# EAGLE board tetris (EAGLE 6.0)

Size 101.6 x 76.2 mm. Coordinates in mm from the lower left corner, seen from the top.
Outline: 0,0 0,76.2 101.6,76.2 101.6,0 0,0
Copper layers (1*16): Top 0.035mm / dielectric 1.5mm / Bottom 0.035mm
Design rules: minimum track width 10mil, minimum drill 24mil, track to track 8mil, track to pad 8mil, pad to pad 8mil, via to via 8mil, smd to smd 8mil, copper to edge 40mil, drill to drill 8mil, minimum pad ring 10mil, minimum via ring 8mil, stop-mask expansion 4mil, vias tented up to drill 0mil, thermal gap 10mil

## Footprints (pad centres in the part's own frame; a part is rotated, then mirrored left to right if it is on the bottom)
LED3MM = drill 0.813 octagon: A -1.27,0; K 1.27,0
PDIP-T28 = drill 0.813 pad 1.2: 1 -16.51,-3.81; 2 -13.97,-3.81; 3 -11.43,-3.81; 4 -8.89,-3.81; 5 -6.35,-3.81; 6 -3.81,-3.81; 7 -1.27,-3.81; 8 1.27,-3.81; 9 3.81,-3.81; 10 6.35,-3.81; 11 8.89,-3.81; 12 11.43,-3.81; 13 13.97,-3.81; 14 16.51,-3.81; 15 16.51,3.81; 16 13.97,3.81; 17 11.43,3.81; 18 8.89,3.81; 19 6.35,3.81; 20 3.81,3.81; 21 1.27,3.81; 22 -1.27,3.81; 23 -3.81,3.81; 24 -6.35,3.81; 25 -8.89,3.81; 26 -11.43,3.81; 27 -13.97,3.81; 28 -16.51,3.81
B3F-10XX = drill 1.016 long: 1 -3.251,2.261; 2 3.251,2.261; 3 -3.251,-2.261; 4 3.251,-2.261
7SEG-13 = drill 0.813 long: 1 -5.08,-7.62; 2 -2.54,-7.62; 3 0,-7.62; 4 2.54,-7.62; 5 5.08,-7.62; 6 5.08,7.62; 7 2.54,7.62; 8 0,7.62; 9 -2.54,7.62; 10 -5.08,7.62

## Placement (x,y rotation side)
00  [LED3MM]  2.54,15.24 0 top
0A  [LED3MM]  53.34,15.24 0 top
0B  [LED3MM]  58.42,15.24 0 top
0C  [LED3MM]  63.5,15.24 0 top
0D  [LED3MM]  68.58,15.24 0 top
0E  [LED3MM]  73.66,15.24 0 top
01  [LED3MM]  7.62,15.24 0 top
1A  [LED3MM]  53.34,20.32 0 top
1B  [LED3MM]  58.42,20.32 0 top
1C  [LED3MM]  63.5,20.32 0 top
1D  [LED3MM]  68.58,20.32 0 top
1E  [LED3MM]  73.66,20.32 0 top
02  [LED3MM]  12.7,15.24 0 top
2A  [LED3MM]  53.34,25.4 0 top
2B  [LED3MM]  58.42,25.4 0 top
2C  [LED3MM]  63.5,25.4 0 top
2D  [LED3MM]  68.58,25.4 0 top
2E  [LED3MM]  73.66,25.4 0 top
03  [LED3MM]  17.78,15.24 0 top
3A  [LED3MM]  53.34,30.48 0 top
3B  [LED3MM]  58.42,30.48 0 top
3C  [LED3MM]  63.5,30.48 0 top
3D  [LED3MM]  68.58,30.48 0 top
3E  [LED3MM]  73.66,30.48 0 top
04  [LED3MM]  22.86,15.24 0 top
4A  [LED3MM]  53.34,35.56 0 top
4B  [LED3MM]  58.42,35.56 0 top
4C  [LED3MM]  63.5,35.56 0 top
4D  [LED3MM]  68.58,35.56 0 top
4E  [LED3MM]  73.66,35.56 0 top
05  [LED3MM]  27.94,15.24 0 top
5A  [LED3MM]  53.34,40.64 0 top
5B  [LED3MM]  58.42,40.64 0 top
5C  [LED3MM]  63.5,40.64 0 top
5D  [LED3MM]  68.58,40.64 0 top
5E  [LED3MM]  73.66,40.64 0 top
06  [LED3MM]  33.02,15.24 0 top
6A  [LED3MM]  53.34,45.72 0 top
6B  [LED3MM]  58.42,45.72 0 top
6C  [LED3MM]  63.5,45.72 0 top
6D  [LED3MM]  68.58,45.72 0 top
6E  [LED3MM]  73.66,45.72 0 top
07  [LED3MM]  38.1,15.24 0 top
7A  [LED3MM]  53.34,50.8 0 top
7B  [LED3MM]  58.42,50.8 0 top
7C  [LED3MM]  63.5,50.8 0 top
7D  [LED3MM]  68.58,50.8 0 top
7E  [LED3MM]  73.66,50.8 0 top
08  [LED3MM]  43.18,15.24 0 top
8A  [LED3MM]  53.34,55.88 0 top
8B  [LED3MM]  58.42,55.88 0 top
8C  [LED3MM]  63.5,55.88 0 top
8D  [LED3MM]  68.58,55.88 0 top
8E  [LED3MM]  73.66,55.88 0 top
09  [LED3MM]  48.26,15.24 0 top
9A  [LED3MM]  53.34,60.96 0 top
9B  [LED3MM]  58.42,60.96 0 top
9C  [LED3MM]  63.5,60.96 0 top
9D  [LED3MM]  68.58,60.96 0 top
9E  [LED3MM]  73.66,60.96 0 top
10  [LED3MM]  2.54,20.32 0 top
11  [LED3MM]  7.62,20.32 0 top
12  [LED3MM]  12.7,20.32 0 top
13  [LED3MM]  17.78,20.32 0 top
14  [LED3MM]  22.86,20.32 0 top
15  [LED3MM]  27.94,20.32 0 top
16  [LED3MM]  33.02,20.32 0 top
17  [LED3MM]  38.1,20.32 0 top
18  [LED3MM]  43.18,20.32 0 top
19  [LED3MM]  48.26,20.32 0 top
20  [LED3MM]  2.54,25.4 0 top
21  [LED3MM]  7.62,25.4 0 top
22  [LED3MM]  12.7,25.4 0 top
23  [LED3MM]  17.78,25.4 0 top
24  [LED3MM]  22.86,25.4 0 top
25  [LED3MM]  27.94,25.4 0 top
26  [LED3MM]  33.02,25.4 0 top
27  [LED3MM]  38.1,25.4 0 top
28  [LED3MM]  43.18,25.4 0 top
29  [LED3MM]  48.26,25.4 0 top
30  [LED3MM]  2.54,30.48 0 top
31  [LED3MM]  7.62,30.48 0 top
32  [LED3MM]  12.7,30.48 0 top
33  [LED3MM]  17.78,30.48 0 top
34  [LED3MM]  22.86,30.48 0 top
35  [LED3MM]  27.94,30.48 0 top
36  [LED3MM]  33.02,30.48 0 top
37  [LED3MM]  38.1,30.48 0 top
38  [LED3MM]  43.18,30.48 0 top
39  [LED3MM]  48.26,30.48 0 top
40  [LED3MM]  2.54,35.56 0 top
41  [LED3MM]  7.62,35.56 0 top
42  [LED3MM]  12.7,35.56 0 top
43  [LED3MM]  17.78,35.56 0 top
44  [LED3MM]  22.86,35.56 0 top
45  [LED3MM]  27.94,35.56 0 top
46  [LED3MM]  33.02,35.56 0 top
47  [LED3MM]  38.1,35.56 0 top
48  [LED3MM]  43.18,35.56 0 top
49  [LED3MM]  48.26,35.56 0 top
50  [LED3MM]  2.54,40.64 0 top
51  [LED3MM]  7.62,40.64 0 top
52  [LED3MM]  12.7,40.64 0 top
53  [LED3MM]  17.78,40.64 0 top
54  [LED3MM]  22.86,40.64 0 top
55  [LED3MM]  27.94,40.64 0 top
56  [LED3MM]  33.02,40.64 0 top
57  [LED3MM]  38.1,40.64 0 top
58  [LED3MM]  43.18,40.64 0 top
59  [LED3MM]  48.26,40.64 0 top
60  [LED3MM]  2.54,45.72 0 top
61  [LED3MM]  7.62,45.72 0 top
62  [LED3MM]  12.7,45.72 0 top
63  [LED3MM]  17.78,45.72 0 top
64  [LED3MM]  22.86,45.72 0 top
65  [LED3MM]  27.94,45.72 0 top
66  [LED3MM]  33.02,45.72 0 top
67  [LED3MM]  38.1,45.72 0 top
68  [LED3MM]  43.18,45.72 0 top
69  [LED3MM]  48.26,45.72 0 top
70  [LED3MM]  2.54,50.8 0 top
71  [LED3MM]  7.62,50.8 0 top
72  [LED3MM]  12.7,50.8 0 top
73  [LED3MM]  17.78,50.8 0 top
74  [LED3MM]  22.86,50.8 0 top
75  [LED3MM]  27.94,50.8 0 top
76  [LED3MM]  33.02,50.8 0 top
77  [LED3MM]  38.1,50.8 0 top
78  [LED3MM]  43.18,50.8 0 top
79  [LED3MM]  48.26,50.8 0 top
80  [LED3MM]  2.54,55.88 0 top
81  [LED3MM]  7.62,55.88 0 top
82  [LED3MM]  12.7,55.88 0 top
83  [LED3MM]  17.78,55.88 0 top
84  [LED3MM]  22.86,55.88 0 top
85  [LED3MM]  27.94,55.88 0 top
86  [LED3MM]  33.02,55.88 0 top
87  [LED3MM]  38.1,55.88 0 top
88  [LED3MM]  43.18,55.88 0 top
89  [LED3MM]  48.26,55.88 0 top
90  [LED3MM]  2.54,60.96 0 top
91  [LED3MM]  7.62,60.96 0 top
92  [LED3MM]  12.7,60.96 0 top
93  [LED3MM]  17.78,60.96 0 top
94  [LED3MM]  22.86,60.96 0 top
95  [LED3MM]  27.94,60.96 0 top
96  [LED3MM]  33.02,60.96 0 top
97  [LED3MM]  38.1,60.96 0 top
98  [LED3MM]  43.18,60.96 0 top
99  [LED3MM]  48.26,60.96 0 top
A0  [LED3MM]  78.74,15.24 0 top
A1  [LED3MM]  78.74,20.32 0 top
A2  [LED3MM]  78.74,25.4 0 top
A3  [LED3MM]  78.74,30.48 0 top
A4  [LED3MM]  78.74,35.56 0 top
A5  [LED3MM]  78.74,40.64 0 top
A6  [LED3MM]  78.74,45.72 0 top
A7  [LED3MM]  78.74,50.8 0 top
A8  [LED3MM]  78.74,55.88 0 top
A9  [LED3MM]  78.74,60.96 0 top
B0  [LED3MM]  83.82,15.24 0 top
B1  [LED3MM]  83.82,20.32 0 top
B2  [LED3MM]  83.82,25.4 0 top
B3  [LED3MM]  83.82,30.48 0 top
B4  [LED3MM]  83.82,35.56 0 top
B5  [LED3MM]  83.82,40.64 0 top
B6  [LED3MM]  83.82,45.72 0 top
B7  [LED3MM]  83.82,50.8 0 top
B8  [LED3MM]  83.82,55.88 0 top
B9  [LED3MM]  83.82,60.96 0 top
C0  [LED3MM]  88.9,15.24 0 top
C1  [LED3MM]  88.9,20.32 0 top
C2  [LED3MM]  88.9,25.4 0 top
C3  [LED3MM]  88.9,30.48 0 top
C4  [LED3MM]  88.9,35.56 0 top
C5  [LED3MM]  88.9,40.64 0 top
C6  [LED3MM]  88.9,45.72 0 top
C7  [LED3MM]  88.9,50.8 0 top
C8  [LED3MM]  88.9,55.88 0 top
C9  [LED3MM]  88.9,60.96 0 top
D0  [LED3MM]  93.98,15.24 0 top
D1  [LED3MM]  93.98,20.32 0 top
D2  [LED3MM]  93.98,25.4 0 top
D3  [LED3MM]  93.98,30.48 0 top
D4  [LED3MM]  93.98,35.56 0 top
D5  [LED3MM]  93.98,40.64 0 top
D6  [LED3MM]  93.98,45.72 0 top
D7  [LED3MM]  93.98,50.8 0 top
D8  [LED3MM]  93.98,55.88 0 top
D9  [LED3MM]  93.98,60.96 0 top
E0  [LED3MM]  99.06,15.24 0 top
E1  [LED3MM]  99.06,20.32 0 top
E2  [LED3MM]  99.06,25.4 0 top
E3  [LED3MM]  99.06,30.48 0 top
E4  [LED3MM]  99.06,35.56 0 top
E5  [LED3MM]  99.06,40.64 0 top
E6  [LED3MM]  99.06,45.72 0 top
E7  [LED3MM]  99.06,50.8 0 top
E8  [LED3MM]  99.06,55.88 0 top
E9  [LED3MM]  99.06,60.96 0 top
E$1  [PDIP-T28]  20.32,69.85 0 top
E$2  [B3F-10XX]  93.98,69.85 180 top
E$3  [B3F-10XX]  82.55,69.85 180 top
E$4  [B3F-10XX]  93.98,6.35 180 top
E$5  [B3F-10XX]  82.55,6.35 180 top
E$6  [B3F-10XX]  71.12,69.85 180 top
E$7  [B3F-10XX]  71.12,6.35 180 top
E$8  [7SEG-13]  10.16,6.35 90 top
E$9  [7SEG-13]  29.21,6.35 90 top
E$10  [7SEG-13]  48.26,6.35 90 top

## Library data of the parts
00 0A 0B 0C 0D 0E 01 1A 1B 1C 1D 1E 02 2A 2B 2C 2D 2E 03 3A 3B 3C 3D 3E 04 4A 4B 4C 4D 4E 05 5A 5B 5C 5D 5E 06 6A 6B 6C 6D 6E 07 7A 7B 7C 7D 7E 08 8A 8B 8C 8D 8E 09 9A 9B 9C 9D 9E 10-99 A0 A1-A9 B0 B1-B9 C0 C1-C9 D0 D1-D9 E0 E1-E9 = led
E$1 = texas
E$2-E$7 = switch-omron
E$8-E$10 = special

## Nets
D: 00.A 11.A 22.A 33.A 44.A 55.A 66.A 77.A 88.A 99.A
S0: 00.K 0A.A 0B.A 0C.A 0D.A 0E.A 01.A 02.A 03.A 04.A 05.A 06.A 07.A 08.A 09.A 10.K 20.K 30.K 40.K 50.K 60.K 70.K 80.K 90.K A0.K B0.K C0.K D0.K E0.K
S1: 01.K 1A.A 1B.A 1C.A 1D.A 1E.A 10.A 11.K 12.A 13.A 14.A 15.A 16.A 17.A 18.A 19.A 21.K 31.K 41.K 51.K 61.K 71.K 81.K 91.K A1.K B1.K C1.K D1.K E1.K
S2: 02.K 2A.A 2B.A 2C.A 2D.A 2E.A 12.K 20.A 21.A 22.K 23.A 24.A 25.A 26.A 27.A 28.A 29.A 32.K 42.K 52.K 62.K 72.K 82.K 92.K A2.K B2.K C2.K D2.K E2.K
S3: 03.K 3A.A 3B.A 3C.A 3D.A 3E.A 13.K 23.K 30.A 31.A 32.A 33.K 34.A 35.A 36.A 37.A 38.A 39.A 43.K 53.K 63.K 73.K 83.K 93.K A3.K B3.K C3.K D3.K E3.K
S4: 04.K 4A.A 4B.A 4C.A 4D.A 4E.A 14.K 24.K 34.K 40.A 41.A 42.A 43.A 44.K 45.A 46.A 47.A 48.A 49.A 54.K 64.K 74.K 84.K 94.K A4.K B4.K C4.K D4.K E4.K
S5: 05.K 5A.A 5B.A 5C.A 5D.A 5E.A 15.K 25.K 35.K 45.K 50.A 51.A 52.A 53.A 54.A 55.K 56.A 57.A 58.A 59.A 65.K 75.K 85.K 95.K A5.K B5.K C5.K D5.K E5.K
S6: 06.K 6A.A 6B.A 6C.A 6D.A 6E.A 16.K 26.K 36.K 46.K 56.K 60.A 61.A 62.A 63.A 64.A 65.A 66.K 67.A 68.A 69.A 76.K 86.K 96.K A6.K B6.K C6.K D6.K E6.K
S7: 07.K 7A.A 7B.A 7C.A 7D.A 7E.A 17.K 27.K 37.K 47.K 57.K 67.K 70.A 71.A 72.A 73.A 74.A 75.A 76.A 77.K 78.A 79.A 87.K 97.K A7.K B7.K C7.K D7.K E7.K
S8: 08.K 8A.A 8B.A 8C.A 8D.A 8E.A 18.K 28.K 38.K 48.K 58.K 68.K 78.K 80.A 81.A 82.A 83.A 84.A 85.A 86.A 87.A 88.K 89.A 98.K A8.K B8.K C8.K D8.K E8.K
S9: 09.K 9A.A 9B.A 9C.A 9D.A 9E.A 19.K 29.K 39.K 49.K 59.K 69.K 79.K 89.K 90.A 91.A 92.A 93.A 94.A 95.A 96.A 97.A 98.A 99.K A9.K B9.K C9.K D9.K E9.K
S10: 0A.K 1A.K 2A.K 3A.K 4A.K 5A.K 6A.K 7A.K 8A.K 9A.K A0.A A1.A A2.A A3.A A4.A A5.A A6.A A7.A A8.A A9.A
S11: 0B.K 1B.K 2B.K 3B.K 4B.K 5B.K 6B.K 7B.K 8B.K 9B.K B0.A B1.A B2.A B3.A B4.A B5.A B6.A B7.A B8.A B9.A
S12: 0C.K 1C.K 2C.K 3C.K 4C.K 5C.K 6C.K 7C.K 8C.K 9C.K C0.A C1.A C2.A C3.A C4.A C5.A C6.A C7.A C8.A C9.A
S13: 0D.K 1D.K 2D.K 3D.K 4D.K 5D.K 6D.K 7D.K 8D.K 9D.K D0.A D1.A D2.A D3.A D4.A D5.A D6.A D7.A D8.A D9.A
S14: 0E.K 1E.K 2E.K 3E.K 4E.K 5E.K 6E.K 7E.K 8E.K 9E.K E0.A E1.A E2.A E3.A E4.A E5.A E6.A E7.A E8.A E9.A

## Tracks (layer width: path | path; a pad name or v marks a point on that pad's centre or on a via)
D  (9 unrouted)
S0  (28 unrouted)
S1  (28 unrouted)
S2  (28 unrouted)
S3  (28 unrouted)
S4  (28 unrouted)
S5  (28 unrouted)
S6  (28 unrouted)
S7  (28 unrouted)
S8  (28 unrouted)
S9  (28 unrouted)
S10  (19 unrouted)
S11  (19 unrouted)
S12  (19 unrouted)
S13  (19 unrouted)
S14  (19 unrouted)